# Altium PCB Transmitter_PCB.PcbDoc
Units mm, origin at the board's own origin, x right, y up, seen from the top; angles counter-clockwise.
Board outline 113.37 x 66.67 mm, 2 copper layers (Top Layer, Bottom Layer), stack 1.271 mm thick; 12 components, 37 nets, 103 pads, 15 vias.
Unrouted connection lines stored in the file: 1.
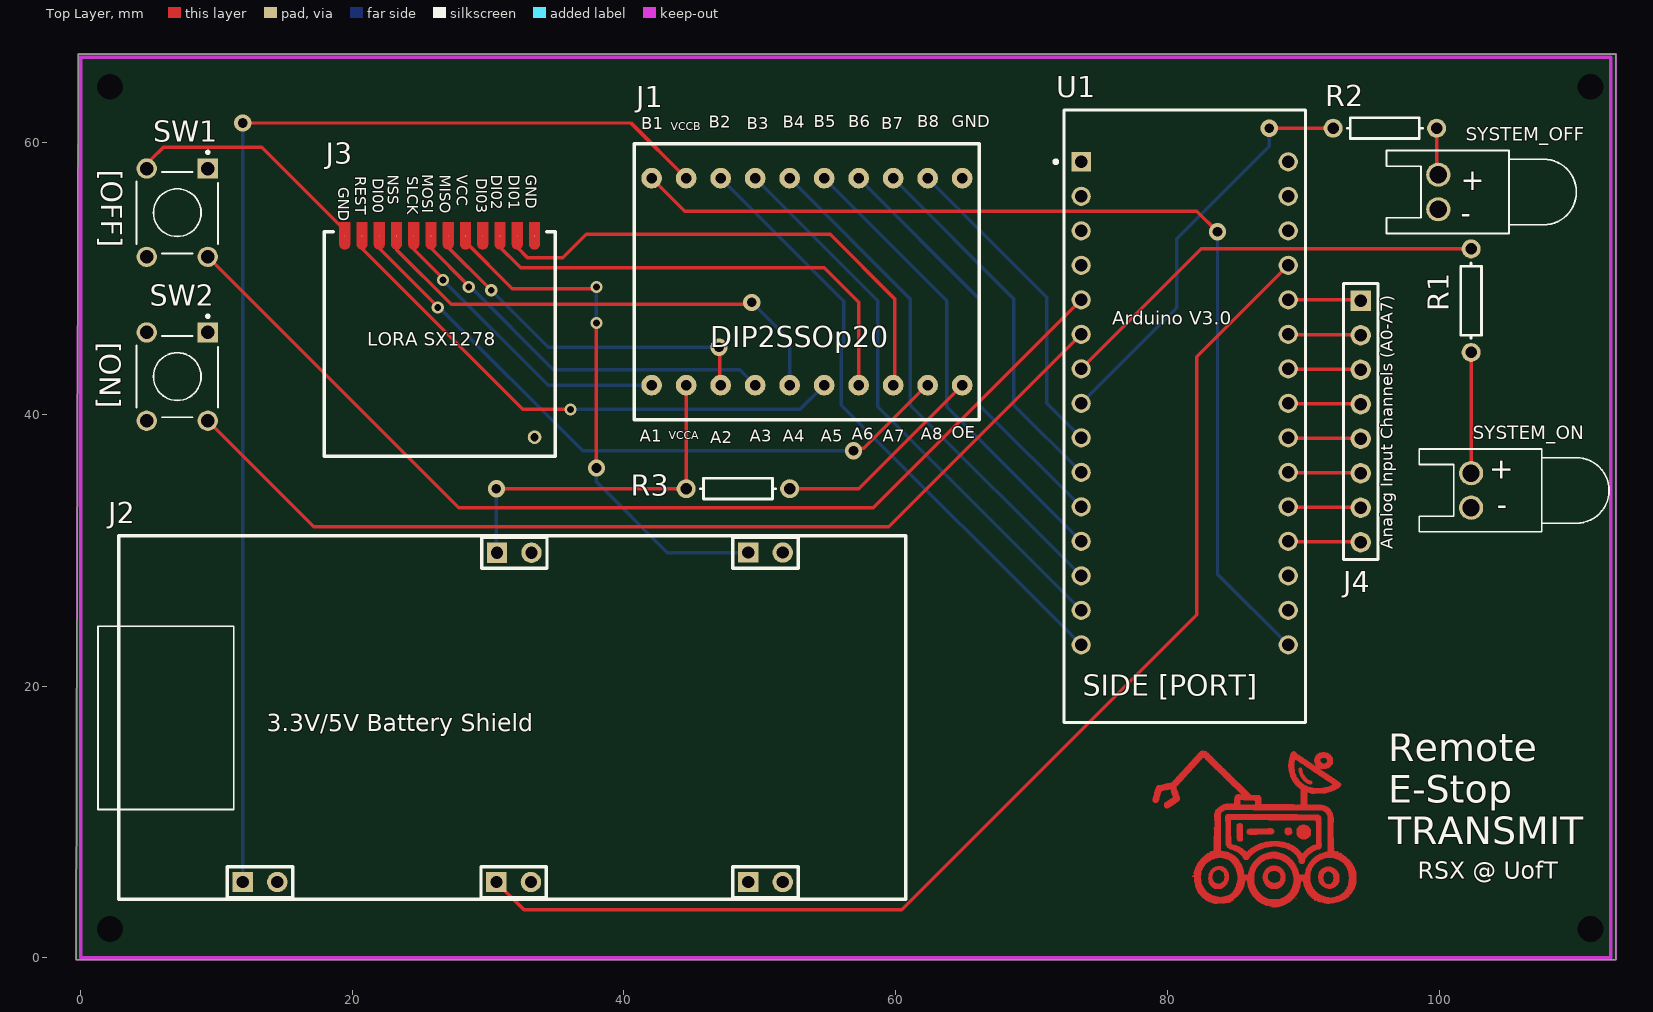
[diagram p0: Top Layer view]
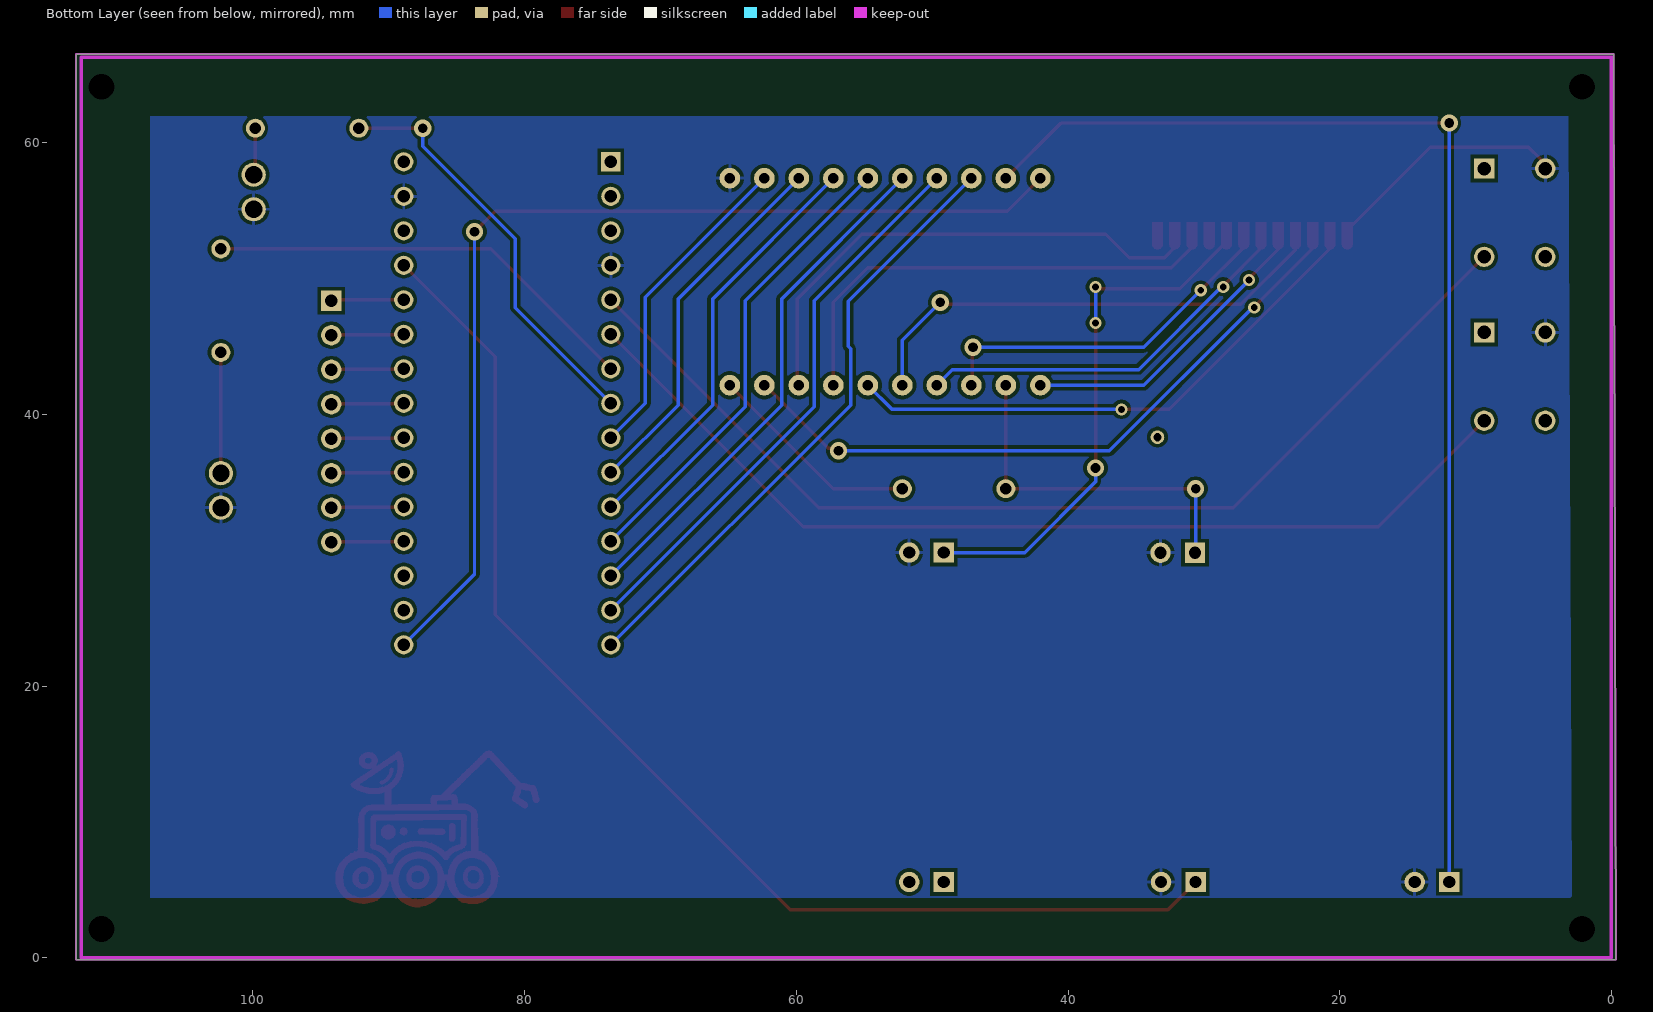
[diagram p1: Bottom Layer view, seen from below]

## Layer stack, top to bottom
Top Solder: solder mask 0.0102, Solder Resist, Dk 3.5
Top Layer: signal copper 0.0356
Dielectric 1: dielectric 1.2, FR-4, Dk 4.8
Bottom Layer: signal copper 0.0356
Bottom Solder: solder mask 0.0102, Solder Resist, Dk 3.5

## Board outline
-0.162,66.548 113.03,66.548 113.03,-0.127 -0.343,-0.127

## Design rules (kind name [scope] priority, off if disabled: settings)
Clearance [All] p1: gap=0.254 ignorepadtopadclearanceinfootprint=FALSE
PolygonConnect [All] p1: connectstyle=Relief reliefconductorwidth=0.254 reliefentries=4 polygonreliefangle="90 Angle" airgapwidth=0.254
RoutingVias [All] p1: holewidth=0.711 width=1.27 viastyle="Through Hole" minholewidth=0.711 minwidth=1.27 maxholewidth=0.711 maxwidth=1.27
SilkToSolderMaskClearance [IsPad] p1: minsilkscreentomaskgap=0.15 clearancetoexposedcopper=TRUE
SolderMaskExpansion [All] p1: expansion=0.102 istentingtop=FALSE
Width [All] p1: maxlimit=0.508 minlimit=0.254 preferedwidth=0.254 minimp=50.000000 maximp=50.000000 favimp=50.000000
29 further rules are at their usual default settings.

## Components (designator, comment, footprint, x,y, rotation, side; value= is the part's Value field where it differs from the comment)
J1 "Logic_Shift" DIP2SSOP20 42.037,57.404 r0 top
J2 "Header 6X2" "3.3V/5V Battery Shield - duplicate" 2.794,4.318 r0 top
J3 "Header 12" "LORA Sx1278" 34.938,53.451 r180 top
J4 "Header 8" HDR1X8 94.234,48.387 r270 top
R1 "Res1" AXIAL-0.3 102.362,48.387 r90 top value=220
R2 "Res1" AXIAL-0.3 96.012,61.087 r180 top value=220
R3 "Res1" AXIAL-0.3 48.387,34.544 r180 top value=1K
SW1 "1825910-6" SW_1825910-6-4 7.112,54.864 r270 top
SW2 "1825910-6" SW_1825910-6-4 7.112,42.799 r270 top
SYSTEM_OFF "Red_LED" LED-0 99.949,56.388 r90 top (schematic designator TX_SIG_1)
SYSTEM_ON "Green_LED" LED-0 102.362,34.417 r90 top (schematic designator TX_SIG_0)
U1 "A000005" FP-A000005-MFG 81.28,39.878 r0 top

## Footprints (in the part's own frame and the unit in brackets; to place one, negate y for a bottom-side part, rotate by r counter-clockwise, add the part's x,y. Pads: shape width x height; smd on the part's side, far side on the other; paste and mask are expansions set on the pad)
"3.3V/5V Battery Shield - duplicate" [mm]
  rect 1.5x1.5 hole 0.9: 1(9.144,1.27) 2(27.853,25.518) 5(27.813,1.27) 6(46.355,25.527) 9(46.355,1.27)
  round 1.5 hole 0.9: 3(11.684,1.27) 4(30.393,25.518) 7(30.353,1.27) 8(48.895,25.527) 11(48.895,1.27)
  silkscreen extent -1.52,0 57.94,26.75
AXIAL-0.3 [mm] "Axial Device, Thru-Hole; 2 Leads; 0.3 in Pin Spacing"
  round 1.4 hole 0.85: 1(-3.81,0) 2(3.81,0)
  silkscreen extent -2.77,-0.76 2.77,0.76
DIP2SSOP20 [mil]
  round 60 hole 30: 1(0,-600) 2(100,-600) 3(200,-600) 4(300,-600) 5(400,-600) 6(500,-600) 7(600,-600) 8(700,-600) 9(800,-600) 10(900,-600) 11(900,0) 12(800,0) 13(700,0) 14(600,0) 15(500,0) 16(400,0) 17(300,0) 18(200,0) 19(100,0) 20(0,0)
  silkscreen extent -50,-700 950,100
FP-A000005-MFG [mil]
  rect 55.67x55.67 hole 35.98 paste-39370.1 mask+0: 1(-300,737.5)
  round 55.67 hole 35.98 paste-39370.1 mask+0: 2(-300,637.5) 3(-300,537.5) 4(-300,437.5) 5(-300,337.5) 6(-300,237.5) 7(-300,137.5) 8(-300,37.5) 9(-300,-62.5) 10(-300,-162.5) 11(-300,-262.5) 12(-300,-362.5) 13(-300,-462.5) 14(-300,-562.5) 15(-300,-662.5) 16(300,-662.5) 17(300,-562.5) 18(300,-462.5) 19(300,-362.5) 20(300,-262.5) 21(300,-162.5) 22(300,-62.5) 23(300,37.5) 24(300,137.5) 25(300,237.5) 26(300,337.5) 27(300,437.5) 28(300,537.5) 29(300,637.5) 30(300,737.5)
  silkscreen extent -379,-888 350,888, body extent -354,-891 354,891, height 10
HDR1X8 [mm] "Connector; Header; 8 Position"
  rect 1.5x1.5 hole 0.9: 1(0,0)
  round 1.5 hole 0.9: 2(2.54,0) 3(5.08,0) 4(7.62,0) 5(10.16,0) 6(12.7,0) 7(15.24,0) 8(17.78,0)
  silkscreen extent -1.27,-1.27 19.05,1.27
LED-0 [mil] "LED; 2 Leads"
  round 70 hole 50: 1(50,0) 2(-50,0)
  silkscreen extent -120,-400 120,150
"LORA Sx1278" [mil]
  round 1 smd: 1(610,11.81) 2(560,11.81) 3(510,11.81) 4(460,11.81) 5(410,11.81) 6(360,11.81) 7(310,11.81) 8(260,11.81) 9(210,11.81) 10(160,11.81) 11(110,11.81) 12(60,11.81)
  round 39.37 hole 23.62: ANT(60,595)
  Top Layer region: 44.25,-27.56 75.75,-27.56 75.75,35.43 74.55,41.46 71.14,46.57 66.03,49.98 60,51.18 60,51.18 53.97,49.98 48.86,46.57 45.45,41.46 44.25,35.43 44.25,35.43
  Top Layer region: 144.25,-27.56 175.75,-27.56 175.75,35.43 174.55,41.46 171.14,46.57 166.03,49.98 160,51.18 160,51.18 153.97,49.98 148.86,46.57 145.45,41.46 144.25,35.43 144.25,35.43
  Top Layer region: 94.25,-27.56 125.75,-27.56 125.75,35.43 124.55,41.46 121.14,46.57 116.03,49.98 110,51.18 110,51.18 103.97,49.98 98.86,46.57 95.45,41.46 94.25,35.43 94.25,35.43
  Top Layer region: 544.25,-27.56 575.75,-27.56 575.75,35.43 574.55,41.46 571.14,46.57 566.03,49.98 560,51.18 560,51.18 553.97,49.98 548.86,46.57 545.45,41.46 544.25,35.43 544.25,35.43
  Top Layer region: 494.25,-27.56 525.75,-27.56 525.75,35.43 524.55,41.46 521.14,46.57 516.03,49.98 510,51.18 510,51.18 503.97,49.98 498.86,46.57 495.45,41.46 494.25,35.43 494.25,35.43
  Top Layer region: 444.25,-27.56 475.75,-27.56 475.75,35.43 474.55,41.46 471.14,46.57 466.03,49.98 460,51.18 460,51.18 453.97,49.98 448.86,46.57 445.45,41.46 444.25,35.43 444.25,35.43
  Top Layer region: 394.25,-27.56 425.75,-27.56 425.75,35.43 424.55,41.46 421.14,46.57 416.03,49.98 410,51.18 410,51.18 403.97,49.98 398.86,46.57 395.45,41.46 394.25,35.43 394.25,35.43
  Top Layer region: 344.25,-27.56 375.75,-27.56 375.75,35.43 374.55,41.46 371.14,46.57 366.03,49.98 360,51.18 360,51.18 353.97,49.98 348.86,46.57 345.45,41.46 344.25,35.43 344.25,35.43
  Top Layer region: 294.25,-27.56 325.75,-27.56 325.75,35.43 324.55,41.46 321.14,46.57 316.03,49.98 310,51.18 310,51.18 303.97,49.98 298.86,46.57 295.45,41.46 294.25,35.43 294.25,35.43
  Top Layer region: 244.25,-27.56 275.75,-27.56 275.75,35.43 274.55,41.46 271.14,46.57 266.03,49.98 260,51.18 260,51.18 253.97,49.98 248.86,46.57 245.45,41.46 244.25,35.43 244.25,35.43
  Top Layer region: 194.25,-27.56 225.75,-27.56 225.75,35.43 224.55,41.46 221.14,46.57 216.03,49.98 210,51.18 210,51.18 203.97,49.98 198.86,46.57 195.45,41.46 194.25,35.43 194.25,35.43
  Top Layer region: 594.25,-27.56 625.75,-27.56 625.75,35.43 624.55,41.46 621.14,46.57 616.03,49.98 610,51.18 610,51.18 603.97,49.98 598.86,46.57 595.45,41.46 594.25,35.43 594.25,35.43
  silkscreen extent 0,0 669,650
SW_1825910-6-4 [mm]
  rect 1.498x1.498 hole 0.99: 1(-3.25,2.25)
  round 1.498 hole 0.99: 2(3.25,2.25) 3(-3.25,-2.25) 4(3.25,-2.25)
  silkscreen extent -4.54,-3 3,3

## Part data
J1: library part "Header 10X2", "Header, 10-Pin, Dual row", LatestRevisionDate=17-Jul-2002, LatestRevisionNote="Re-released for DXP Platform.", Publisher="Altium Limited"
J2: "Header, 6-Pin, Dual row", LatestRevisionDate=17-Jul-2002, LatestRevisionNote="Re-released for DXP Platform.", Publisher="Altium Limited"
J3: "Header, 12-Pin", LatestRevisionDate=17-Jul-2002, LatestRevisionNote="Re-released for DXP Platform.", Publisher="Altium Limited"
J4: "Header, 8-Pin", LatestRevisionDate=17-Jul-2002, LatestRevisionNote="Re-released for DXP Platform.", Publisher="Altium Limited"
R1 R2 R3: "Resistor", LatestRevisionDate=17-Jul-2002, LatestRevisionNote="Re-released for DXP Platform.", PackageDescription="Axial Device, Thru-Hole; 2 Leads; 0.3 in Pin Spacing", PackageReference=AXIAL-0.3, Published=8-Jun-2000, Publisher="Altium Limited"
SW1 SW2: "Switch Tactile OFF (ON) SPST Round Button PC Pins 0.05A 24VDC 100000Cycles 1.57N Thru-Hole Loose", Package=None, Availability=Unavailable, MP=1825910-6, Price=None
SYSTEM_OFF SYSTEM_ON: library part LED0, "Typical INFRARED GaAs LED", LatestRevisionDate=08-Jul-2005, LatestRevisionNote="Mech Layer 1 removed.", PackageDescription="LED; 2 Leads", PackageReference=LED-0, Published=8-Jun-2000, Publisher="Altium Limited"
U1: library part CMP-189986-000002-1, "ARDUINO NANO ATMEGA328 EVAL BRD", Operating Supply Voltage=12V, Package Quantity=50, Core Architecture=AVR, Data Bus Width=8b, Evaluation Kit=Yes, Height=0.25inch, Interface=I2C, Length=7inch, Number of Bits=8, Packaging=Bulk, REACH SVHC="No SVHC", Series="AVR® ATmega", Weight=0.358383oz, Width=5inch

## Free pads (board coordinates)
  round 1.524 hole 1.9: 1(2.159,64.135) 2(111.159,64.135) 3(2.159,2.135) 4(111.159,2.135)

## Via types
v1: diameter 1.27, hole 0.711, Top Layer to Bottom Layer, 8 vias
v2: diameter 0.9, hole 0.5, Top Layer to Bottom Layer, 7 vias

## Nets (pads, with @x,y where several pads share a name; then routed paths per layer and width w, separated by ;. In a path a pad name is that pad's centre, name@x,y a point inside that pad or via, vN(x,y) a via of type N, cw(c..) or ccw(c..) an arc to the next point about the centre after c; other vN are vias at no path point)
DI03: J3.9
GND: J1.11 J2.3 J2.4 J2.7 J2.8 J3.1 J3.12 SW1.3 SW2.3 SYSTEM_OFF.2 SYSTEM_ON.2 U1.4 U1.29 | length 18.4
  Top Layer w0.254: SW1.3 4.862,58.451 5.236,58.825 5.236,58.83 6.096,59.69 13.324,59.69 19.444,53.57 J3.1
NetJ1_1: J1.1 J3.5 | length 22.1
  Top Layer w0.254: 24.384,52.451 24.384,52.324 26.67,50.038 v2(26.67,49.911)
  Bottom Layer w0.254: v2(26.67,49.911) 34.417,42.164 J1.1
NetJ1_2: J1.2 J2.2 R3.2 | length 26.5
  Top Layer w0.254: v1(30.607,34.544) R3.2 J1.2
  Bottom Layer w0.254: v1(30.607,34.544) 30.607,29.876 J2.2 ; R3.2@44.45,34.417 R3.2
NetJ1_3: J1.3 J3.7 | length 26
  Top Layer w0.254: 26.924,52.451 v2(30.226,49.149) ; v1(46.99,44.958) 47.053,44.895 47.053,42.227 J1.3
  Bottom Layer w0.254: v2(30.226,49.149) 34.417,44.958 v1(46.99,44.958)
NetJ1_4: J1.4 J3.6 | length 28.3
  Top Layer w0.254: 25.654,52.451 25.654,52.387 28.575,49.466 v2(28.575,49.403)
  Bottom Layer w0.254: v2(28.575,49.403) 28.702,49.403 34.798,43.307 48.514,43.307 J1.4
NetJ1_5: J1.5 J3.4 | length 36.2
  Top Layer w0.254: 23.114,52.368 23.114,52.451 ; J3.4 23.254,52.152 27.273,48.133 49.149,48.133 49.276,48.26 v1(49.403,48.26)
  Bottom Layer w0.254: v1(49.403,48.26) 52.197,45.466 J1.5
NetJ1_6: J1.6 J3.2 | length 39.9
  Top Layer w0.254: 20.574,52.451 20.574,52.361 32.549,40.386 v2(36.068,40.386)
  Bottom Layer w0.254: v2(36.068,40.386) 52.959,40.386 J1.6
NetJ1_7: J1.7 J3.10 | length 34.4
  Top Layer w0.254: 30.734,52.451 32.385,50.8 54.737,50.8 57.277,48.26 J1.7
NetJ1_8: J1.8 J3.11 | length 38
  Top Layer w0.254: J3.11 32.144,52.311 32.893,51.562 35.495,51.562 37.211,53.278 55.18,53.278 59.944,48.514 59.944,42.291 J1.8
NetJ1_9: J1.9 J3.3 | length 48.8
  Top Layer w0.254: 21.844,52.451 21.844,52.387 26.289,47.942 v2(26.289,47.879) ; v1(56.896,37.338) 57.09,37.532 57.662,37.532 62.294,42.164 J1.9
  Bottom Layer w0.254: v2(26.289,47.879) 26.416,47.879 36.957,37.338 v1(56.896,37.338)
NetJ1_10: J1.10 R3.1 | length 15.9
  Top Layer w0.254: R3.1 57.277,34.544 J1.10
NetJ1_12: J1.12 U1.9 | length 23.8
  Bottom Layer w0.254: J1.12 71.12,48.641 71.12,40.831 U1.9
NetJ1_13: J1.13 U1.10 | length 27.4
  Bottom Layer w0.254: J1.13 68.707,48.514 68.707,40.703 U1.10
NetJ1_14: J1.14 U1.11 | length 31
  Bottom Layer w0.254: J1.14 66.167,48.514 66.167,40.703 U1.11
NetJ1_15: J1.15 U1.12 | length 34.6
  Bottom Layer w0.254: J1.15 63.754,48.387 63.754,40.576 U1.12
NetJ1_16: J1.16 U1.13 | length 38.2
  Bottom Layer w0.254: J1.16 61.087,48.514 61.087,40.703 U1.13
NetJ1_17: J1.17 U1.14 | length 41.8
  Bottom Layer w0.254: J1.17 58.674,48.387 58.674,40.576 U1.14
NetJ1_18: J1.18 U1.15 | length 45.5
  Bottom Layer w0.254: J1.18 56.188,48.333 56.188,45.039 56.007,44.858 56.007,40.703 U1.15
NetJ1_19: J1.19 J2.1 | length 90.2
  Top Layer w0.254: v1(11.938,61.468) 40.513,61.468 J1.19
  Bottom Layer w0.254: J2.1 v1(11.938,61.468)
NetJ1_20: J1.20 U1.16 | length 75.9
  Top Layer w0.254: J1.20 44.459,54.982 82.178,54.982 v1(83.693,53.467)
  Bottom Layer w0.254: v1(83.693,53.467) 83.693,28.258 U1.16
NetJ2_5: J2.5 U1.27 | length 89.9
  Top Layer w0.254: J2.5 32.639,3.556 60.452,3.556 82.169,25.273 82.169,44.259 U1.27
NetJ2_6: J2.6 J3.8 | length 39.4
  Top Layer w0.254: 28.194,53.291 J3.8 28.334,52.717 31.775,49.276 37.846,49.276 v2(37.973,49.403) ; v1(37.973,36.068) v2(37.973,46.736)
  Bottom Layer w0.254: v1(37.973,36.068) 37.973,35.052 43.18,29.845 J2.6 ; v2(37.973,46.736) v2(37.973,49.403)
NetJ4_1: J4.1 U1.26 | length 5.4
  Top Layer w0.254: U1.26 94.17,48.45 J4.1
NetJ4_2: J4.2 U1.25 | length 5.4
  Top Layer w0.254: U1.25 88.932,45.879 94.202,45.879 J4.2
NetJ4_3: J4.3 U1.24 | length 5.4
  Top Layer w0.254: U1.24 88.932,43.339 94.202,43.339 J4.3
NetJ4_4: J4.4 U1.23 | length 5.4
  Top Layer w0.254: U1.23 88.932,40.799 94.202,40.799 J4.4
NetJ4_5: J4.5 U1.22 | length 5.4
  Top Layer w0.254: U1.22 88.932,38.259 94.202,38.259 J4.5
NetJ4_6: J4.6 U1.21 | length 5.4
  Top Layer w0.254: U1.21 88.932,35.719 94.202,35.719 J4.6
NetJ4_7: J4.7 U1.20 | length 5.4
  Top Layer w0.254: U1.20 88.932,33.179 94.202,33.179 J4.7
NetJ4_8: J4.8 U1.19 | length 5.4
  Top Layer w0.254: U1.19 88.932,30.639 94.202,30.639 J4.8
NetR1_1: R1.1 SYSTEM_ON.1 | length 9.1
  Top Layer w0.254: SYSTEM_ON.1 R1.1 R1.1@102.489,44.45
NetR1_2: R1.2 U1.7 | length 32.6
  Top Layer w0.254: U1.7 82.486,52.197 R1.2 ; R1.2@102.148,51.943 R1.2@102.362,51.943
NetR2_1: R2.1 SYSTEM_OFF.1 | length 3.7
  Top Layer w0.254: SYSTEM_OFF.1@99.822,57.404 R2.1
NetR2_2: R2.2 U1.8 | length 30.7
  Top Layer w0.254: v1(87.503,61.087) R2.2
  Bottom Layer w0.254: U1.8 80.692,47.863 80.692,52.943 87.503,59.753 v1(87.503,61.087)
NetSW1_2: SW1.2 U1.5 | length 78.3
  Top Layer w0.254: SW1.2 27.829,33.147 58.356,33.147 U1.5
NetSW2_2: SW2.2 U1.6 | length 73.4
  Top Layer w0.254: SW2.2 17.161,31.75 59.499,31.75 U1.6
pads on no net: J2.9 J2.11 J3.ANT SW1.1 SW1.4 SW2.1 SW2.4 U1.1 U1.2 U1.3 U1.17 U1.18 U1.28 U1.30

## Polygon pours and split planes (outlines as drawn)
GND on Bottom Layer "GND_L02_P000" (solid, pour order 0): 3.174,61.977 3.175,61.976 107.569,61.976 107.569,4.445 2.921,4.445

## Keep-outs
Keep-Out Layer:
  lines w0.127: -0.343,-0.127 -0.162,66.548 113.03,66.548 113.03,-0.127 -0.343,-0.127
  lines w0.254: 0,0 0,66.294 112.649,66.294 112.649,0 0,0

## Other copper
Top Layer:
  region: 2160 vertices and 7 holes, not listed, extent 78.939,3.746 93.923,15.261
  region: 90.441,12.816 90.355,12.816 90.355,12.844 90.298,12.844 90.298,12.872 90.27,12.872 90.27,12.901 90.213,12.901 90.213,12.929 90.185,12.929 90.185,12.958 90.156,12.958 90.156,12.986 90.099,12.986 90.099,13.015 90.071,13.015 90.071,13.043 90.043,13.043 90.043,13.072 90.014,13.072 90.014,13.128 89.986,13.128 89.986,13.157 89.957,13.157 89.957,13.185 89.929,13.185 89.929,13.214 89.9,13.214 89.9,13.271 89.872,13.271 89.872,13.299 89.843,13.299 89.843,13.356 89.815,13.356 89.815,13.413 89.787,13.413 89.787,13.47 89.758,13.47 89.758,13.526 89.73,13.526 89.73,13.612 89.701,13.612 89.701,13.725 89.673,13.725 89.673,13.953 89.701,13.953 89.701,13.981 89.73,13.981 89.73,14.01 89.872,14.01 89.872,13.981 89.9,13.981 89.9,13.896 89.929,13.896 89.929,13.697 89.957,13.697 89.957,13.612 89.986,13.612 89.986,13.555 90.014,13.555 90.014,13.498 90.043,13.498 90.043,13.441 90.071,13.441 90.071,13.413 90.099,13.413 90.099,13.356 90.128,13.356 90.128,13.327 90.156,13.327 90.156,13.299 90.185,13.299 90.185,13.271 90.213,13.271 90.213,13.214 90.242,13.214 90.242,13.185 90.298,13.185 90.298,13.157 90.327,13.157 90.327,13.128 90.355,13.128 90.355,13.1 90.384,13.1 90.384,13.072 90.441,13.072 90.441,13.043 90.583,13.043 90.583,13.015 90.64,13.015 90.64,12.958 90.668,12.958 90.668,12.844 90.64,12.844 90.64,12.816 90.583,12.816 90.583,12.787 90.441,12.787
  region: 85.422,8.579 85.28,8.579 85.28,8.608 85.223,8.608 85.223,8.636 85.166,8.636 85.166,8.664 85.137,8.664 85.137,8.778 85.109,8.778 85.109,9.802 85.137,9.802 85.137,9.859 85.166,9.859 85.166,9.887 85.28,9.887 85.28,9.915 85.393,9.915 85.393,9.887 85.479,9.887 85.479,9.859 85.507,9.859 85.507,9.802 85.535,9.802 85.535,9.688 85.564,9.688 85.564,8.721 85.535,8.721 85.535,8.664 85.507,8.664 85.507,8.636 85.479,8.636 85.479,8.608 85.422,8.608
  region: 89.687,9.66 89.687,9.688 89.715,9.688 89.715,9.716 89.772,9.716 89.772,9.745 89.829,9.745 89.829,9.773 89.943,9.773 89.943,9.802 90.113,9.802 90.113,9.773 90.227,9.773 90.227,9.745 90.284,9.745 90.284,9.716 90.341,9.716 90.341,9.688 90.369,9.688 90.369,9.66 90.397,9.66 90.397,9.631 90.426,9.631 90.426,9.603 90.454,9.603 90.454,9.574 90.483,9.574 90.483,9.517 90.511,9.517 90.511,9.489 90.54,9.489 90.54,9.404 90.568,9.404 90.568,9.119 90.54,9.119 90.54,9.034 90.511,9.034 90.511,8.977 90.483,8.977 90.483,8.949 90.454,8.949 90.454,8.92 90.426,8.92 90.426,8.892 90.397,8.892 90.397,8.863 90.369,8.863 90.369,8.835 90.312,8.835 90.312,8.807 90.255,8.807 90.255,8.778 90.198,8.778 90.198,8.75 89.914,8.75 89.914,8.778 89.829,8.778 89.829,8.807 89.772,8.807 89.772,8.835 89.744,8.835 89.744,8.863 89.687,8.863 89.687,8.892 89.658,8.892 89.658,8.92 89.63,8.92 89.63,8.949 89.601,8.949 89.601,9.006 89.573,9.006 89.573,9.062 89.544,9.062 89.544,9.119 89.516,9.119 89.516,9.432 89.544,9.432 89.544,9.517 89.573,9.517 89.573,9.546 89.601,9.546 89.601,9.603 89.63,9.603 89.63,9.631 89.658,9.631 89.658,9.66
  region: 133 vertices and 1 holes, not listed, extent 83.005,5.082 84.512,6.759
  region: 92.956,7.584 92.956,7.612 92.985,7.612 92.985,7.584
  region: 92.729,7.755 92.729,7.726 92.701,7.726 92.701,7.755
  region: 92.53,7.811 92.473,7.811 92.473,7.84 92.53,7.84
  region: 89.459,4.371 89.459,4.4 89.488,4.4 89.488,4.371
  region: 141 vertices and 1 holes, not listed, extent 87.042,5.082 88.691,6.788
  region: 92.587,7.783 92.558,7.783 92.558,7.811 92.587,7.811
  region: 93.127,7.499 93.127,7.47 93.099,7.47 93.099,7.499
  region: 86.559,9.062 86.019,9.062 86.019,9.091 85.962,9.091 85.962,9.119 85.905,9.119 85.905,9.148 85.877,9.148 85.877,9.205 85.848,9.205 85.848,9.375 85.877,9.375 85.877,9.432 85.905,9.432 85.905,9.461 85.962,9.461 85.962,9.489 86.047,9.489 86.047,9.517 87.44,9.517 87.44,9.546 87.639,9.546 87.639,9.517 87.753,9.517 87.753,9.489 87.782,9.489 87.782,9.461 87.81,9.461 87.81,9.432 87.839,9.432 87.839,9.375 87.867,9.375 87.867,9.262 87.839,9.262 87.839,9.205 87.81,9.205 87.81,9.148 87.753,9.148 87.753,9.119 87.696,9.119 87.696,9.091 86.587,9.091 86.587,9.062
  region: 84.853,4.229 84.825,4.229 84.825,4.257 84.853,4.257
  region: 89.118,9.489 89.118,9.461 89.146,9.461 89.146,9.404 89.175,9.404 89.175,9.29 89.203,9.29 89.203,9.233 89.175,9.233 89.175,9.176 89.146,9.176 89.146,9.148 89.118,9.148 89.118,9.119 89.09,9.119 89.09,9.091 89.033,9.091 89.033,9.062 88.947,9.062 88.947,9.034 88.834,9.034 88.834,9.062 88.777,9.062 88.777,9.091 88.72,9.091 88.72,9.119 88.691,9.119 88.691,9.176 88.663,9.176 88.663,9.233 88.635,9.233 88.635,9.432 88.663,9.432 88.663,9.489 88.691,9.489 88.691,9.517 88.72,9.517 88.72,9.546 88.777,9.546 88.777,9.574 88.834,9.574 88.834,9.603 88.976,9.603 88.976,9.574 89.033,9.574 89.033,9.546 89.09,9.546 89.09,9.517 89.118,9.517
  region: 131 vertices and 1 holes, not listed, extent 91.108,5.11 92.672,6.703
  region: 301 vertices and 1 holes, not listed, extent 84.256,6.93 91.364,10.569

## Silkscreen, mask and mechanical layers (free items; w line width, h text height)
Top Overlay:
  text "[OFF]" at 1.524,58.039 h1.52 r270
  text "+" at 101.6,56.515 h1.52
  text "-" at 101.6,54.102 h1.52
  text "Arduino V3.0" at 75.946,46.609 h1
  text "[ON]" at 1.397,45.339 h1.52 r270
  text "LORA SX1278" at 21.082,45.085 h1
  text "+" at 105.283,35.052 h1.52 r90
  text "-" at 105.029,33.782 h1.52 r180
  text "Analog Input Channels (A0-A7)" at 96.901,30.099 h1.52 r90
  text "SIDE [PORT]" at 73.787,19.304 h1.52
  text "3.3V/5V Battery Shield" at 13.716,16.679 h1.27
  text "Remote / E-Stop / TRANSMIT" at 96.268,8.382 h2.03
  text "RSX @ UofT" at 98.425,5.842 h1.27

## Text inside footprints (layer, text, board x,y; h text height)
J1: Top Overlay "B1" at 41.275,60.706 h1.52; Top Overlay "A8" at 61.849,37.846 h1.52; Top Overlay "A7" at 59.055,37.719 h1.52; Top Overlay "A6" at 56.769,37.846 h1.52; Top Overlay "A5" at 54.483,37.719 h1.52; Top Overlay "A4" at 51.689,37.719 h1.52; Top Overlay "A3" at 49.276,37.719 h1.52; Top Overlay "A2" at 46.355,37.592 h1.52; Top Overlay "A1" at 41.148,37.719 h1.52; Top Overlay "B3" at 49.022,60.723 h1.52; Top Overlay "B4" at 51.689,60.833 h1.52; Top Overlay "B5" at 53.975,60.85 h1.52; Top Overlay "B6" at 56.515,60.85 h1.52; Top Overlay "B7" at 58.928,60.706 h1.52; Top Overlay "B8" at 61.595,60.85 h1.52; Top Overlay "B2" at 46.228,60.833 h1.52; Top Overlay "VCCA" at 43.306,37.973 h1.02; Top Overlay "OE" at 64.135,37.973 h1.52; Top Overlay "GND" at 64.135,60.85 h1.52; Top Overlay "VCCB" at 43.434,60.717 h1.02; Top Overlay "DIP2SSOp20" at 46.355,44.958 h1.52
J3: Top Overlay "GND" at 32.779,57.642 h0.8 r270; Top Overlay "VCC" at 27.699,57.642 h0.8 r270; Top Overlay "DI02" at 30.239,57.642 h0.8 r270; Top Overlay "NSS" at 22.619,57.642 h0.8 r270; Top Overlay "MISO" at 26.429,57.642 h0.8 r270; Top Overlay "MOSI" at 25.159,57.687 h0.8 r270; Top Overlay "DI01" at 31.509,57.642 h0.8 r270; Top Overlay "SLCK" at 24.039,57.549 h0.8 r270; Top Overlay "REST" at 20.229,57.549 h0.8 r270; Top Overlay "DI03" at 29.119,57.416 h0.8 r270; Top Overlay "DI00" at 21.499,57.416 h0.8 r270; Top Overlay "GND" at 18.959,56.75 h0.8 r270